# Altium PCB PCB1.PcbDoc
Units mm, origin at the board's own origin, x right, y up, seen from the top; angles counter-clockwise.
Board outline 57.66 x 24.64 mm, 2 copper layers (Top Layer, Bottom Layer); 30 components, 44 nets, 165 pads, 61 vias.
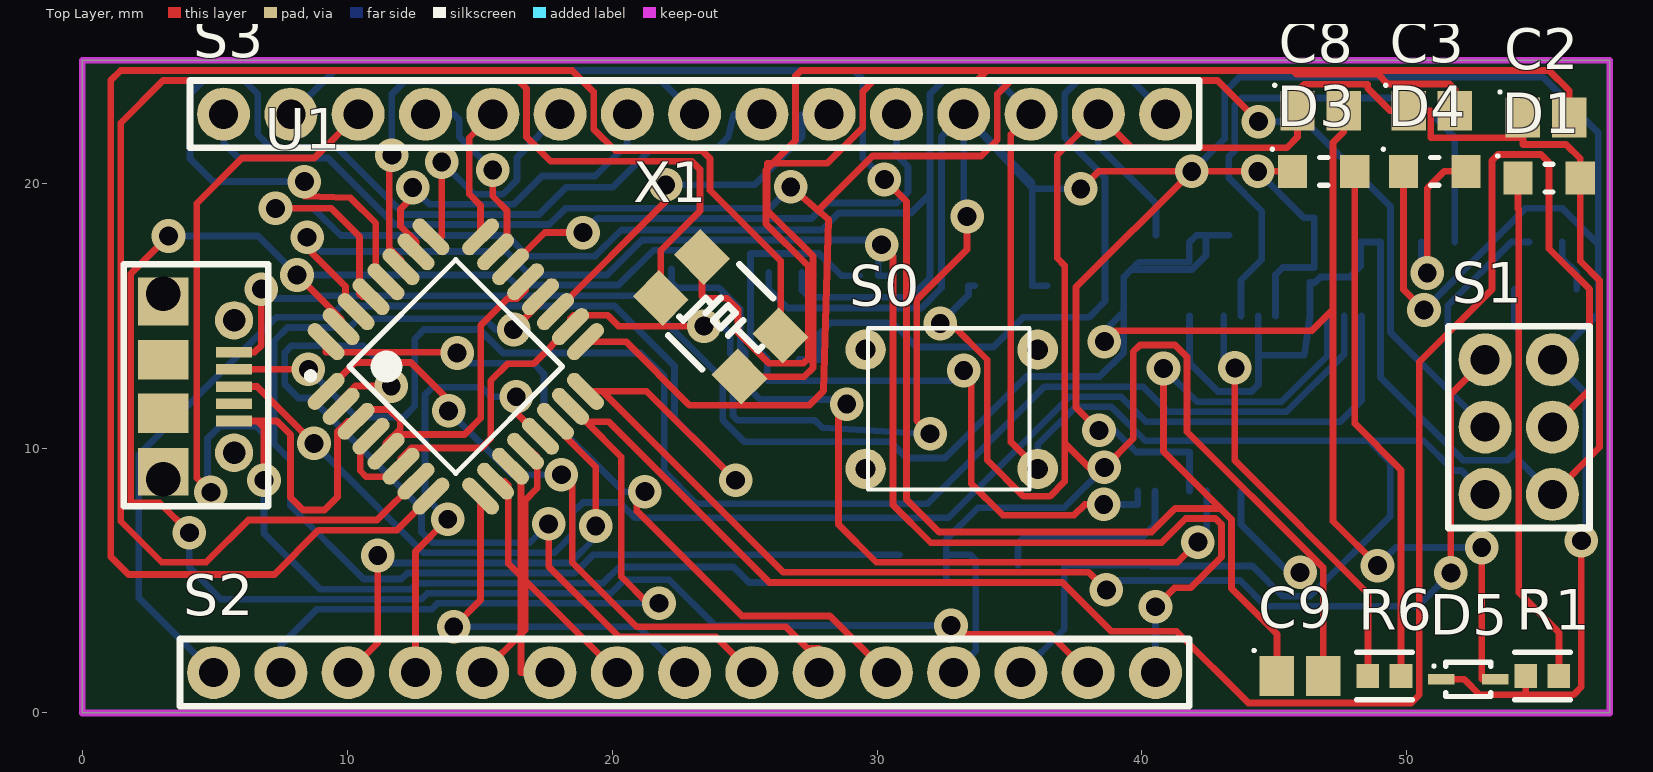
[diagram p0: Top Layer view]
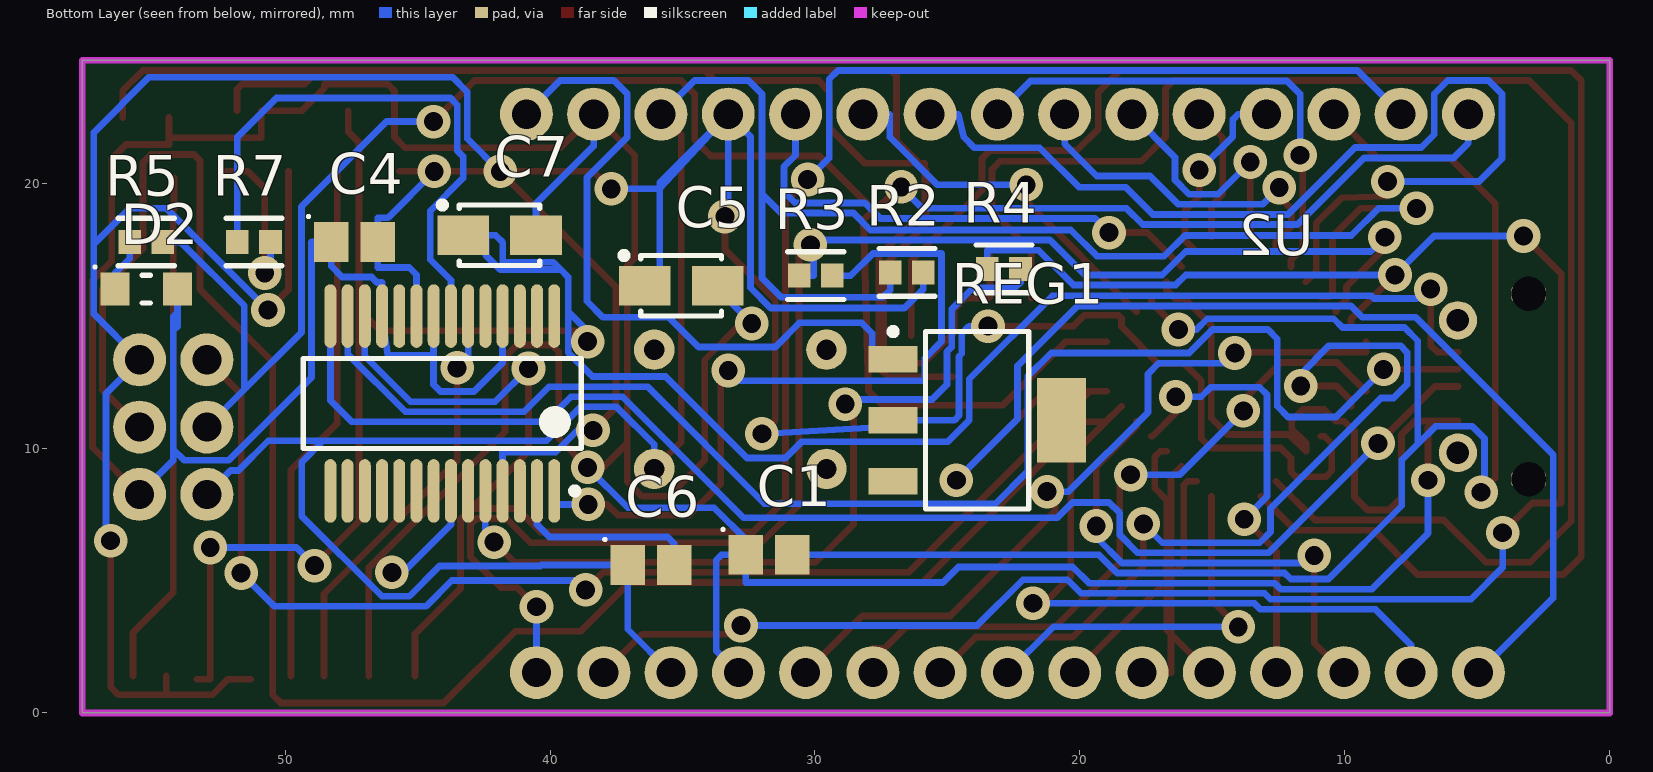
[diagram p1: Bottom Layer view, seen from below]

## Layer stack, top to bottom
Top Solder: solder mask 0.0102, Solder Resist, Dk 3.5
Top Layer: signal copper 0.0356
Dielectric 1: dielectric 0.32, FR-4, Dk 4.8
Bottom Layer: signal copper 0.0356
Bottom Solder: solder mask 0.0102, Solder Resist, Dk 3.5

## Board outline
0,0 0,24.638 57.658,24.638 57.658,0

## Design rules (kind name [scope] priority, off if disabled: settings)
Clearance [All] p1: gap=0.127 ignorepadtopadclearanceinfootprint=FALSE
PolygonConnect [All] p1: connectstyle=Relief reliefconductorwidth=0.254 reliefentries=4 polygonreliefangle="90 Angle" airgapwidth=0.254
RoutingVias [All] p1: holewidth=0.711 width=1.27 viastyle="Through Hole" minholewidth=0.711 minwidth=1.27 maxholewidth=0.711 maxwidth=1.27
SolderMaskExpansion [All] p1: expansion=0.102 istentingtop=FALSE
Width [All] p1: maxlimit=0.254 minlimit=0.254 preferedwidth=0.254
30 further rules are at their usual default settings.

## Components (designator, comment, footprint, x,y, rotation, side; value= is the part's Value field where it differs from the comment)
C1 "100nF Ceramic Multilayer Capacitor_1" CAPCP2012X09N 31.736,5.969 r180 bottom
C2 "C0805C180J5GACTU" CAPCP2012X09N 55.259,22.479 r0 top
C3 "C0805C180J5GACTU" CAPCP2012X09N 50.941,22.733 r0 top
C4 "100nF Ceramic Multilayer Capacitor_1" CAPCP2012X09N 47.385,17.78 r180 bottom
C5 "Capacitor SMT Tantalum" "CASE A - 3216X18" 35.052,16.129 r180 bottom value=4.7µF
C6 "100nF Ceramic Multilayer Capacitor_1" CAPCP2012X09N 36.195,5.588 r180 bottom
C7 "Capacitor SMT Tantalum" "CASE A - 3216X18" 41.91,18.034 r180 bottom value=4.7µF
C8 "100nF Ceramic Multilayer Capacitor_1" CAPCP2012X09N 46.75,22.733 r0 top
C9 "100nF Ceramic Multilayer Capacitor_1" CAPCP2012X09N 45.974,1.397 r0 top
D1 "Kingbright Blue LED, 60 mcd 120 ° 0805" LED1913X12NBLUE 55.372,20.193 r0 top
D2 "Kingbright Red LED, 100 mcd 120 ° 0805" LED1913X12NRED 55.245,16.002 r180 bottom
D3 "Kingbright Red LED, 100 mcd 120 ° 0805" LED1913X12NRED 46.863,20.447 r0 top
D4 "Kingbright Green LED, 70 mcd 120 ° 0805" LED1913X12NGREEN 51.054,20.447 r0 top
D5 "Panasonic DB2J20900L Schottky Diode, 0.5A, 20V, 2.4ns, 2-Pin SMini2 F5 B" DIOM1712X07N 52.324,1.27 r0 top
R1 "ERA-3AEB102V" FP-ERA3A-IPC_C 55.118,1.397 r0 top
R2 "ERA-3AEB102V" FP-ERA3A-IPC_C 26.534,16.637 r180 bottom
R3 "ERA-3AEB102V" FP-ERA3A-IPC_C 29.972,16.51 r180 bottom
R4 "ERA-3AEB102V" FP-ERA3A-IPC_C 22.869,16.764 r180 bottom
R5 "ERA-3AEB102V" FP-ERA3A-IPC_C 55.245,17.78 r180 bottom
R6 "ERA-3AEB102V" FP-ERA3A-IPC_C 49.158,1.397 r0 top
R7 "ERA-3AEB102V" FP-ERA3A-IPC_C 51.181,17.78 r180 bottom
REG1 "LM1117MP-5.0/NOPB, Low Dropout Voltage Regulator, 1.5A, 5 V ±1%, 4-Pin SOT-223" SOT230P700X180-4N 23.876,11.049 r180 bottom
S0 "Tactile Switch SPST- NO 0.05A @24V" "Tactile Switch" 36.068,9.216 r0 top
S1 "Programming Headers Dual Row" "ISP HEADER" 67.056,30.988 r270 top
S2 "connector;str header;single row;.1 cont centers;.095 tail;gold or gtx;36 contact" Header 40.513,1.524 r180 top
S3 "connector;str header;single row;.1 cont centers;.095 tail;gold or gtx;36 contact" Header 40.894,22.606 r180 top
S4 "NewMolex Right Angle SMT Female Type B Micro USB Connector, 30 V ac, 1.8A" MicroUSB 5.726,13.553 r270 top
U1 "ATMEGA328P-AU" TQFP80P900X900X120-32N 14.097,13.081 r45 top
U2 "FT232RL, Universal Asynchronous Receiver & Transmitter 3MBd, 28-Pin, SSOP" SOP65P780X200-28N 44.069,11.684 r90 bottom
X1 "Aker 16MHz Crystal SMT" "Aker S5C Crystal" 21.836,15.664 r135 top value=16MHz

## Footprints (in the part's own frame and the unit in brackets; to place one, negate y for a bottom-side part, rotate by r counter-clockwise, add the part's x,y. Pads: shape width x height; smd on the part's side, far side on the other; paste and mask are expansions set on the pad)
"Aker S5C Crystal" [mm]
  rect 1.6x1.4 smd: 1(0,0) 2(-4.2,0) 3(0,-2.2) 4(-4.2,-2.2)
  round 0.254 on Top Overlay: 5(-3,-2.4)
  silkscreen extent -4,-3 -1,0.8, body extent -4.7,-2.8 0.5,0.6, height 1
CAPCP2012X09N [mm] "Chip Capacitor, 2-Leads, Body 2.00x1.25mm, IPC Medium Density"
  rect 1.3x1.5 smd: 1(-0.875,0) 2(0.875,0)
  silkscreen extent -1.79,0.91 -1.69,1.01, body extent -1.05,-0.57 0.95,0.68, height 0.78
"CASE A - 3216X18" [mm] "Molded Capacitor, 2-Leads, Body 3.2x1.6mm, IPC Medium Density"
  rect 1.95x1.5 smd: 1(-1.375,0) 2(1.375,0)
  silkscreen extent -2.28,-1.14 1.52,1.27, body extent -1.52,-0.76 1.65,0.84, height 1.77
DIOM1712X07N [mm] "Molded Diode, 2-Leads, Body 1.70x1.25mm, IPC Medium Density"
  rect 1x0.4 smd: 1(-1.016,0) 2(1.016,0)
  silkscreen extent -1.35,-0.65 0.85,0.65, body extent -0.9,-0.45 0.9,0.45, height 0.8
FP-ERA3A-IPC_C [mm]
  rect 0.855x0.906 smd paste+0 mask+0: 1(-0.626,0) 2(0.626,0)
  silkscreen extent -1.05,-0.9 1.05,0.9, body extent -1.15,-0.6 1.15,0.6, height 0.25
Header [mm] "SIL Header"
  round 2 hole 1.1: 1(0,0) 2(2.54,0) 3(5.08,0) 4(7.62,0) 5(10.16,0) 6(12.7,0) 7(15.24,0) 8(17.78,0) 9(20.32,0) 10(22.86,0) 11(25.4,0) 12(27.94,0) 13(30.48,0) 14(33.02,0) 15(35.56,0)
  silkscreen extent -1.27,-1.27 36.83,1.27, body extent -1.33,-1.35 36.93,1.35, height 8.6
"ISP HEADER" [mm] "SIL Header for programming"
  round 2 hole 1.1: 1(17.653,-14.097) 2(17.653,-11.557) 3(20.193,-14.097) 4(20.193,-11.557) 5(22.733,-14.097) 6(22.733,-11.557)
  silkscreen extent 16.38,-15.49 24,-10.16, body extent 16.38,-15.37 24,-10.29, height 8
LED1913X12NBLUE [mm] "LED 2-Leads, Body 1.90x1.32mm, IPC Medium Density"
  rect 1.1x1.25 smd: 1(-1.175,0) 2(1.175,0)
  silkscreen extent -1.99,-0.53 0.15,0.89, body extent -1,-0.62 1.02,0.62, height 1.1
LED1913X12NGREEN [mm] "LED 2-Leads, Body 1.90x1.32mm, IPC Medium Density"
  rect 1.1x1.25 smd: 1(-1.175,0) 2(1.175,0)
  silkscreen extent -1.99,-0.53 0.15,0.89, body extent -1.01,-0.62 1.01,0.63, height 1.1
LED1913X12NRED [mm] "LED 2-Leads, Body 1.90x1.32mm, IPC Medium Density"
  rect 1.1x1.25 smd: 1(-1.175,0) 2(1.175,0)
  silkscreen extent -1.99,-0.53 0.15,0.89, body extent -1.02,-0.43 1.04,0.47, height 0.85
MicroUSB [mm] "MicroUSB  Molex 5Pin"
  rect 0.4x1.35 smd: 1(-0.07,0) 2(0.58,0) 3(1.23,0) 4(1.88,0) 5(2.53,0)
  rrect50% 0.6x1.3 hole 1.3: ""(-2.27,-2.667) ""(-2.27,-2.667) ""(4.73,-2.667)
  rect 1.8x1.9 smd: ""(-1.98,-2.678) ""(4.45,-2.678)
  round 1.45 hole 0.85: ""(-1.27,0) ""(3.73,0)
  rect 1.5x1.9 smd: ""(0.218,-2.678) ""(2.242,-2.678)
  silkscreen extent -3.39,-4.17 5.75,1.3, body extent -2.83,-5.32 5.37,0.11, height 2.68
SOP65P780X200-28N [mm] "SOP, 28-Leads, Body 10.20x5.30mm, Pitch 0.65mm, IPC Medium Density"
  oval 2.4x0.45 smd: 1(-3.3,-4.225) 2(-3.3,-3.575) 3(-3.3,-2.925) 4(-3.3,-2.275) 5(-3.3,-1.625) 6(-3.3,-0.975) 7(-3.3,-0.325) 8(-3.3,0.325) 9(-3.3,0.975) 10(-3.3,1.625) 11(-3.3,2.275) 12(-3.3,2.925) 13(-3.3,3.575) 14(-3.3,4.225) 15(3.3,4.225) 16(3.3,3.575) 17(3.3,2.925) 18(3.3,2.275) 19(3.3,1.625) 20(3.3,0.975) 21(3.3,0.325) 22(3.3,-0.325) 23(3.3,-0.975) 24(3.3,-1.625) 25(3.3,-2.275) 26(3.3,-2.925) 27(3.3,-3.575) 28(3.3,-4.225)
  silkscreen extent -3.42,-5.25 1.7,5.25, body extent -3.91,-5.1 3.91,5.1, height 0.5
SOT230P700X180-4N [mm] "SOT223, 4-Leads, Body 6.50x7.00mm (avg), Pitch 2.30mm, IPC Medium Density"
  rect 1.85x1 smd: 1(-3.175,2.3) 2(-3.175,0) 3(-3.175,-2.3)
  rect 1.85x3.2 smd: 4(3.175,0)
  silkscreen extent -3.3,-3.35 1.95,3.47, body extent -3.8,-3.12 3.29,3.38, height 1.65
"Tactile Switch" [mil]
  round 60 hole 30: 1(0,0) 2(-255.91,0) 3(0,177.17) 4(-255.91,177.17)
  silkscreen extent -252,-31 -12,209, body extent -277,-29 27,209, height 197
TQFP80P900X900X120-32N [mm] "TQFP, 32-Leads, Body 7.00x7.00mm, Pitch 0.80mm, IPC Medium Density"
  oval 1.75x0.55 smd: 1(-4.125,2.8) 2(-4.125,2) 3(-4.125,1.2) 4(-4.125,0.4) 5(-4.125,-0.4) 6(-4.125,-1.2) 7(-4.125,-2) 8(-4.125,-2.8) 17(4.125,-2.8) 18(4.125,-2) 19(4.125,-1.2) 20(4.125,-0.4) 21(4.125,0.4) 22(4.125,1.2) 23(4.125,2) 24(4.125,2.8)
  oval 0.55x1.75 smd: 9(-2.8,-4.125) 10(-2,-4.125) 11(-1.2,-4.125) 12(-0.4,-4.125) 13(0.4,-4.125) 14(1.2,-4.125) 15(2,-4.125) 16(2.8,-4.125) 25(2.8,4.125) 26(2,4.125) 27(1.2,4.125) 28(0.4,4.125) 29(-0.4,4.125) 30(-1.2,4.125) 31(-2,4.125) 32(-2.8,4.125)
  silkscreen extent -4.25,-2.85 2.85,3.75, body extent -4.44,-4.5 4.56,4.5, height 1.6

## Part data
C1 C4 C6 C8 C9: "AVX 0805 Standard 100nF Ceramic Multilayer Capacitor, 50 V dc X7R Dielectric ±10% SMD", Capacitance=100nF, Manufacturer=AVX, Package=0805, Voltage=50V, Creator="Ritesh Kanjee", Datasheet URL=http://za.rs-online.com/web/p/ceramic-multilayer-capacitors/4646688/, Date Created="18 February 2015", RS Stock No.=464-6688
C2 C3: library part "18pF Ceramic Multilayer Capacitor, 50 V dc C0G Dielectric ±5% SMD", "18pF Ceramic Multilayer Capacitor, 50 V dc C0G Dielectric ±5% SMD", Capacitance=18pF, Manufacturer=Kemet, Package=0805, Voltage=50V, Creator="Ritesh Kanjee", Datasheet URL=http://za.rs-online.com/web/p/ceramic-multilayer-capacitors/6480935/?searchTerm=C0805C180J5GACTU&relevancy-data=636F3D3226696E3D4931384E4B6E6F776E41734D504E266C753D656E266D6D3D6D61746368616C6C7061727469616C26706D3D5E5B5C707B4C7D5C707B4E647D2D2C2F255C2E5D2B2426706F3D313326736E3D592673743D4D414E5F504152545F4E554D4245522677633D424F5448267573743D4330383035433138304A35474143545526, Date Created="18 February 2015", RS Stock No.=648-0935
C5 C7: library part "4.7µF Tant RS 496-3545", "Capacitor,tantalum,SMT,16V,4.7uF,10%,A-case", Package=3216-18, Tolerance=10%, Voltage=16V, ComponentLink1Description="Supplier Website", ComponentLink1URL=http://za.rs-online.com/web/search/searchBrowseAction.html?method=getProduct&R=4963545, ComponentLink2Description="RS Data sheet", ComponentLink2URL=http://docs-europe.origin.electrocomponents.com/webdocs/04ed/0900766b804ed4cc.pdf, LatestRevisionDate=28-April-2010, Part Originator="H Theron", Publisher=DPSS, RS Stock Nr.=496-3545
D1: Color=Blue, Forward Voltage=3.2V, Manufacturer=KingBright, Manufacturer Part No.=KP-2012PBC-A, Creator="Ritesh Kanjee", Datasheet URL=http://za.rs-online.com/web/p/visible-leds/4663784/, Date Created="18 February 2015", RS Stock No.=466-3784
D2 D3: Color=RED, Forward Voltage=1.85V, Manufacturer=KingBright, Manufacturer Part No.=KP-2012SRC-PRV, Creator="Ritesh Kanjee", Datasheet URL=http://za.rs-online.com/web/p/visible-leds/4663813/, Date Created="18 February 2015", RS Stock No.=466-3813
D4: Color=Green, Forward Voltage="2.1 V", Manufacturer=KingBright, Manufacturer Part No.=KP-2012MGC, Creator="Ritesh Kanjee", Datasheet URL=http://za.rs-online.com/web/p/visible-leds/4663778/, Date Created="18 February 2015", RS Stock No.=466-3778
D5: library part "Schottky Diode, 0.5A, 20V, 2.4ns, 2-Pin SMini2 F5 B", Manufacturer=Panasonic, Manufacturer Part No.=DB2J20900L, Maximum Continuous Forward Current=0.5A, Peak Reverse Repetitive Voltage=20V, Created By="R Kanjee", Datasheet=http://docs-europe.electrocomponents.com/webdocs/1398/0900766b813986b3.pdf, Date Created="1 March 2015", RS Stock No.=713-2703
R1 R2: library part CMP-2000-00873-2, "RES SMD 1K OHM 0.1% 1/10W 0603", Case Code (Imperial)=0603, Case Code (Metric)=1608, Max Operating Temperature=155°C, Max Power Dissipation=100mW, Min Operating Temperature=-55°C, Package Quantity=5000, Resistance=1kR, Resistance Tolerance=0.1%, Resistor Type="Thin Film", Temperature Coefficient=25ppm/°C, Voltage Rating=75V, Case/Package=0603, Construction=Rectangular, Contact Plating=Tin, Depth=0.8mm, Height=0.45mm, Length=1.6mm, Military Standard=Not, Mount="Surface Mount", Number of Pins=2, Number of Terminations=2, Packaging="Tape and Reel", Power Rating=100mW, Radiation Hardening=No, REACH SVHC="No SVHC", RoHS Compliant=Yes, Series=ERA-3A, Size Code=0603, Technology="METAL FILM", Termination=SMD/SMT, Tolerance=0.1%, Width=0.8mm
R3 R4: library part CMP-2000-00873-2, "RES SMD 1K OHM 0.1% 1/10W 0603", Case Code (Imperial)=0603, Case Code (Metric)=1608, Max Operating Temperature=155°C, Max Power Dissipation=100mW, Min Operating Temperature=-55°C, Package Quantity=5000, Resistance=1k, Resistance Tolerance=0.1%, Resistor Type="Thin Film", Temperature Coefficient=25ppm/°C, Voltage Rating=75V, Case/Package=0603, Construction=Rectangular, Contact Plating=Tin, Depth=0.8mm, Height=0.45mm, Length=1.6mm, Military Standard=Not, Mount="Surface Mount", Number of Pins=2, Number of Terminations=2, Packaging="Tape and Reel", Power Rating=100mW, Radiation Hardening=No, REACH SVHC="No SVHC", RoHS Compliant=Yes, Series=ERA-3A, Size Code=0603, Technology="METAL FILM", Termination=SMD/SMT, Tolerance=0.1%, Width=0.8mm
R5 R6 R7: library part CMP-2000-00873-2, "RES SMD 1K OHM 0.1% 1/10W 0603", Case Code (Imperial)=0603, Case Code (Metric)=1608, Max Operating Temperature=155°C, Max Power Dissipation=100mW, Min Operating Temperature=-55°C, Package Quantity=5000, Resistance=330, Resistance Tolerance=0.1%, Resistor Type="Thin Film", Temperature Coefficient=25ppm/°C, Voltage Rating=75V, Case/Package=0603, Construction=Rectangular, Contact Plating=Tin, Depth=0.8mm, Height=0.45mm, Length=1.6mm, Military Standard=Not, Mount="Surface Mount", Number of Pins=2, Number of Terminations=2, Packaging="Tape and Reel", Power Rating=100mW, Radiation Hardening=No, REACH SVHC="No SVHC", RoHS Compliant=Yes, Series=ERA-3A, Size Code=0603, Technology="METAL FILM", Termination=SMD/SMT, Tolerance=0.1%, Width=0.8mm
REG1: library part LM1117MP-5.0, Manufacturer="Texas Instruments", Maximum Input Voltage=15V, Output Voltage=5V, Supply Current=1.5Amps, Created By="R Kanjee", Datasheet URL=http://za.rs-online.com/web/p/low-dropout-voltage-regulators/5339583/, Date Created="26 February 2015", RS Stock No.=533-9583
S0: Manufacturer=Omron, Manufacturer Part No.=B3F1000, Creator="R Kanjee", Date Created="25 February 2015", RS Stock No.=686-6847, State="Normaly Open"
S1: library part "Programming ISP, Programming Headers Dual Row", Current Rating="3Amps Continuous", Manufacturer=FCI, Manufacturer Part No.=68000-236HLF, Created By="R Kanjee", Date Created="1 March 2015", RS Stock No.=2509565626
S2 S3: library part "Single row; PCB headers", Current Rating="3Amps Continuous", Manufacturer=FCI, Manufacturer Part No.=68000-236HLF, Created By="R Kanjee", Date Created="1 March 2015", RS Stock No.=2509565626
S4: library part "Micro USB Connector, 30 V ac, 1.8A", Manufacturer=Molex, Manufacturer Part No.=105017-0001, Max Current=1.8A, Max Voltage=30V, Creator="R Kanjee", Datasheet URL=http://za.rs-online.com/web/p/micro-usb-connectors/8486764/, Date Created="28 February 2015", RS Stock No=848-6764
U1: "ATMEGA328P-AU, 8 bit AVR Microcontroller 20MHz 1 kB, 32 kB Flash, 2 kB RAM, I2C 32-Pin TQFP", Company="Lumina Inova", Created By="Ritesh Kanjee", Datasheet URL=http://docs-europe.electrocomponents.com/webdocs/0db4/0900766b80db4deb.pdf, Date Created="14 February 2015", RS Stock No.=696-3092
U2: library part "FT232RL USB to UART, Universal Asynchronous Receiver & Transmitter 3MBd, 28-Pin, SSOP", Manufacturer="FTDI Chip", Manufacturer Part No.=FT232RL, Creator="R Kanjee", Date Created="03 March 2015", Pin Count=28, RS Stock No.=406-580
X1: library part "Aker  C5S-16.000-12-3030-X", "Aker S5C SMT Crystal", Frequency Stability=+/-30ppm, Load Capacitance=12pF, Manufacturer=Aker, Manufacturer Part #=C5S-16.000-12-3030-X, Package="3.2x5mm SMD", Creator="R Kanjee", HelpURL=http://za.rs-online.com/web/p/crystal-units/6719488/, RS="RS 671-9488", RS Stock Nr.=671-9488, Supplier=RS

## Via types
v1: diameter 1.27, hole 0.711, Top Layer to Bottom Layer, 61 vias

## Nets (pads, with @x,y where several pads share a name; then routed paths per layer and width w, separated by ;. In a path a pad name is that pad's centre, name@x,y a point inside that pad or via, vN(x,y) a via of type N, cw(c..) or ccw(c..) an arc to the next point about the centre after c; other vN are vias at no path point)
3v3: C9.1 S3.14 U2.17 | length 74
  Top Layer w0.254: v1(30.277,20.142) 31.115,19.304 31.115,8.057 32.339,6.833 40.368,6.833 41.257,7.722 42.971,7.722 ; v1(40.818,13.005) 40.818,9.875 42.971,7.722 ; C9.1 45.099,2.983 43.383,4.699 43.383,7.309 42.971,7.722
  Bottom Layer w0.254: S3.14 9.525,24.257 29.134,24.257 29.464,23.927 29.464,20.955 v1(30.277,20.142) ; v1(40.818,13.005) 42.071,11.752 45.28,11.752 46.994,13.466 U2.17
+5: C4.2 C5.1 D3.1 D4.1 D5.1 R1.1 R2.2 REG1.2 S1.2 S3.4 U1.4 U1.6 U1.18 U2.4 U2.20 | length 167.4
  Top Layer w0.254: U1.4 10.764,10.447 10.49,10.173 10.49,9.144 10.719,8.915 11.836,8.915 12.029,9.108 U1.6 12.029,9.616 12.421,10.008 15.062,10.008 15.418,10.363 15.418,12.548 16.053,13.183 17.027,13.183 U1.18 18.428,14.897 18.542,15.011 19.837,15.011 20.244,14.605 v1(23.47,14.605) ; v1(32.004,10.541) 31.496,11.049 31.496,15.596 33.401,17.501 v1(33.401,18.745) ; v1(37.694,19.787) 38.354,20.447 v1(41.885,20.447) ; v1(38.379,10.668) 37.516,11.532 37.516,16.078 v1(41.885,20.447) ; D3.1 v1(44.374,20.447) v1(41.885,20.447) ; D4.1 49.879,15.983 v1(50.648,15.215) ; D5.1 52.172,1.27 52.756,0.686 54.492,0.686 ; R1.1 54.492,0.686 ; v1(56.591,6.502) 56.591,0.991 56.286,0.686 54.492,0.686
  Bottom Layer w0.254: v1(23.47,14.605) 24.181,14.605 24.46,14.326 24.46,13.564 24.562,13.462 24.562,11.227 24.74,11.049 REG1.2 27.661,11.049 27.94,10.77 31.852,10.541 v1(32.004,10.541) ; R2.2 25.908,16.002 26.619,15.291 31.674,15.291 32.436,16.053 32.436,21.768 S3.4 ; v1(33.401,18.745) 33.274,18.872 S3.4 ; C5.1 35.865,16.129 35.865,19.787 ; v1(37.694,19.787) 35.865,19.787 ; v1(38.379,10.668) 38.974,10.668 39.787,9.855 41.794,9.855 U2.4 ; v1(41.885,20.447) 43.129,21.692 43.129,23.444 43.688,24.003 55.143,24.003 57.226,21.92 57.226,17.704 ; v1(44.374,20.447) 46.126,18.694 46.51,18.694 C4.2 46.51,16.819 45.318,16.819 45.044,16.545 U2.20 ; v1(50.648,15.215) 54.483,19.05 55.88,19.05 57.226,17.704 ; v1(56.591,6.502) 56.769,6.68 56.769,12.065 S1.2 57.226,15.062 57.226,17.704 ; S3.4 35.865,19.787 ; S3.4 35.865,20.015 35.865,19.787
A0: S3.12 U1.23 | length 7.3
  Top Layer w0.254: v1(15.494,20.498) 15.494,19.507 16.027,18.974 16.027,17.84 U1.23
  Bottom Layer w0.254: S3.12 14.021,22.606 14.224,22.403 14.224,21.768 v1(15.494,20.498)
A1: S3.11 U1.24 | length 5.2
  Top Layer w0.254: U1.24 15.034,19.165 14.605,19.594 14.605,21.717 S3.11
A2: S3.10 U1.25 | length 10
  Top Layer w0.254: U1.25 13.566,17.978 v1(13.566,20.803)
  Bottom Layer w0.254: v1(13.566,20.803) 14.786,19.583 15.872,19.583 16.406,20.117 16.406,20.978 S3.10
A3: S3.9 U1.26 | length 13.3
  Top Layer w0.254: v1(12.471,19.837) 12.471,19.482 12.014,19.025 12.014,18.375 12.594,17.795 U1.26
  Bottom Layer w0.254: v1(12.471,19.837) 13.106,19.202 16.282,19.202 17.355,20.276 19.361,20.276 20.574,21.488 S3.9
A4: S3.8 U1.27 | length 18.9
  Top Layer w0.254: v1(11.684,21.057) 11.582,20.955 11.582,17.551 12.029,17.105 U1.27
  Bottom Layer w0.254: v1(11.684,21.057) 11.684,23.368 12.176,23.86 21.86,23.86 S3.8
A5: S3.7 U1.28 | length 39.8
  Top Layer w0.254: v1(8.382,20.062) 8.382,19.507 10.109,19.456 11.074,18.491 11.074,16.669 U1.28
  Bottom Layer w0.254: v1(8.382,20.062) 4.932,20.062 4.064,20.93 4.064,23.368 4.572,23.876 6.112,23.876 6.62,23.368 6.62,21.844 7.112,21.352 9.611,21.352 12.141,18.821 17.245,18.821 18.276,19.853 20.03,19.853 21.514,21.336 23.978,21.336 24.384,21.742 24.587,22.606 S3.7
A6: S3.6 U1.19 | length 14.3
  Top Layer w0.254: U1.19 22.022,19.309 v1(22.022,19.939)
  Bottom Layer w0.254: v1(22.022,19.939) 25.375,19.939 27.178,21.742 27.178,22.606 S3.6
A7: S3.5 U1.22 | length 19.3
  Top Layer w0.254: U1.22 17.455,18.136 v1(18.898,18.136)
  Bottom Layer w0.254: v1(18.898,18.136) 19.431,18.669 27.534,18.669 28.118,19.253 30.745,19.253 31.166,19.674 31.166,20.625 30.734,21.057 S3.5
AREF: C1.2 S3.13 U1.20 | length 65.9
  Top Layer w0.254: v1(4.851,8.331) 4.318,8.865 4.318,19.239 6.03,20.951 8.759,20.951 S3.13 ; v1(16.281,14.478) 17.297,15.493 U1.20
  Bottom Layer w0.254: v1(4.851,8.331) 4.724,8.458 4.724,10.363 5.182,10.82 6.579,10.82 7.245,10.154 ; v1(16.281,14.478) 15.596,14.478 15.189,14.884 10.414,14.884 10.084,14.554 7.747,14.554 7.245,14.053 7.245,10.154 ; C1.2 19.279,5.969 18.593,5.283 12.268,5.283 12.04,5.055 10.617,5.055 7.849,7.823 7.849,9.55 7.245,10.154
D0/Rx: R3.1 S2.1 U1.30 | length 58.9
  Top Layer w0.254: v1(8.484,17.958) 8.28,17.755 9.931,16.104 9.931,15.615 10.332,15.215 U1.30 ; v1(30.175,17.678) 30.607,17.247 30.607,7.849 32.029,6.426 40.742,6.426 41.656,7.341 42.774,7.341 43.002,7.112 43.002,5.893 41.834,4.724 41.224,4.724 v1(40.513,4.013)
  Bottom Layer w0.254: v1(8.484,17.958) 9.017,17.424 16.002,17.424 16.891,16.535 19.812,16.535 21.133,17.856 29.743,17.856 29.921,17.678 v1(30.175,17.678) 30.048,17.551 30.048,16.51 R3.1 ; S2.1 v1(40.513,4.013)
D1/Tx: R4.1 S2.2 U1.31 | length 75.8
  Top Layer w0.254: v1(3.251,18.009) 1.829,16.586 1.829,7.925 2.921,7.925 v1(4.039,6.807) ; v1(8.103,16.535) 9.766,14.872 U1.31 ; v1(32.791,3.302) 33.122,2.972 36.525,2.972 S2.2
  Bottom Layer w0.254: v1(3.251,18.009) 6.629,18.009 v1(8.103,16.535) 16.002,16.535 16.383,16.154 20.245,16.154 21.562,17.471 23.495,17.471 R4.1 ; v1(4.039,6.807) 4.039,5.486 5.232,4.293 12.802,4.293 13.03,4.521 19.964,4.521 20.472,5.029 22.149,5.029 23.876,3.302 v1(32.791,3.302)
D2: S2.5 U1.32 | length 28.5
  Top Layer w0.254: U1.32 9.2,13.614 14.122,13.614 v1(14.148,13.589) ; v1(21.234,8.357) 21.162,8.357 20.934,8.128 20.934,7.622 24.898,3.658 28.219,3.658 S2.5
  Bottom Layer w0.254: v1(14.148,13.589) 14.122,13.589 14.122,13.411 14.326,13.208 17.022,13.208 17.428,12.802 17.428,11.35 20.422,8.357 v1(21.234,8.357)
D3: S2.6 U1.1 | length 26.4
  Top Layer w0.254: U1.1 10.29,13.233 12.404,13.233 13.826,11.811 v1(13.826,11.405) ; v1(18.085,8.992) 18.491,8.585 18.491,5.69 20.93,3.251 26.568,3.251 27.381,2.438 27.813,2.438 S2.6
  Bottom Layer w0.254: v1(13.826,11.405) 16.239,8.992 v1(18.085,8.992)
D4: S2.7 U1.2 | length 32.8
  Top Layer w0.254: U1.2 9.766,11.798 10.312,12.344 v1(11.659,12.344) ; v1(17.602,7.137) 17.602,5.537 20.269,2.87 23.927,2.87 S2.7
  Bottom Layer w0.254: v1(11.659,12.344) 11.659,12.802 10.592,13.868 7.899,13.868 7.645,13.614 7.645,12.395 8.153,11.887 8.636,11.887 12.802,7.722 12.802,6.833 13.208,6.426 16.891,6.426 v1(17.602,7.137)
D5: S2.8 U1.9 | length 14.8
  Top Layer w0.254: v1(14.021,3.251) 15.034,4.264 U1.9
  Bottom Layer w0.254: v1(14.021,3.251) 21.006,3.251 S2.8
D6: S2.9 U1.10 | length 9.3
  Top Layer w0.254: U1.10 15.939,8.75 16.078,8.611 16.078,5.639 S2.9
D7: S2.10 U1.11 | length 9
  Top Layer w0.254: U1.11 16.561,8.92 16.561,1.524 S2.10
D8: S2.11 U1.12 | length 9.5
  Top Layer w0.254: S2.11 16.713,3.124 16.713,8.026 17.17,8.484 17.17,9.677 16.966,9.881 U1.12
D9: S2.12 U1.13 | length 17
  Top Layer w0.254: S2.12 12.573,6.096 v1(13.792,7.315) ; v1(16.383,11.938) 16.383,11.328 17.264,10.447 U1.13
  Bottom Layer w0.254: v1(13.792,7.315) 12.937,8.17 12.937,12.023 13.208,12.294 15.062,12.294 15.418,11.938 v1(16.383,11.938)
D10: S2.13 U1.14 | length 18.6
  Top Layer w0.254: S2.13 11.151,2.642 v1(11.151,5.944) ; U1.14 17.862,10.811 19.38,9.293 v1(19.38,7.061)
  Bottom Layer w0.254: v1(11.151,5.944) 11.43,5.664 18.411,5.664 19.38,6.634 v1(19.38,7.061)
D11/MOST: S1.4 S2.14 U1.15 | length 95.9
  Top Layer w0.254: U1.15 U1.15@19.007,10.999 ; v1(21.768,4.14) 21.361,4.14 20.345,5.156 20.345,9.661 U1.15@19.007,10.999 ; S1.4 56.896,12.192 56.896,16.002 55.372,17.526 55.372,20.777 55.067,21.082 53.442,21.082 53.213,20.853 53.213,15.991 50.47,13.248 50.47,0.686 50.165,0.381 44.018,0.381 41.317,3.082 38.847,3.082 37.001,4.928 25.933,4.928 19.862,10.999 U1.15@19.007,10.999
  Bottom Layer w0.254: S2.14 7.493,2.565 8.839,3.912 13.183,3.912 13.411,4.14 v1(21.768,4.14)
D12/MISO: S1.1 S2.15 U1.16 | length 90
  Top Layer w0.254: U1.16 19.631,12.144 ; v1(24.663,8.788) 21.308,12.144 19.631,12.144 ; v1(38.659,4.648) 37.998,5.309 26.467,5.309 19.631,12.144 ; v1(51.664,5.283) 51.664,12.04 S1.1
  Bottom Layer w0.254: S2.15 2.134,4.343 2.134,9.754 7.315,14.935 9.334,14.935 9.765,15.367 20.091,15.367 22.352,13.106 22.352,11.1 v1(24.663,8.788) ; v1(38.659,4.648) 39.014,5.004 43.713,5.004 44.69,4.027 50.408,4.027 v1(51.664,5.283)
D13/SCK: R5.2 S1.3 S3.15 U1.17 | length 87.1
  Top Layer w0.254: U1.17 20.523,14.018 22.925,11.616 27.432,11.616 27.978,12.162 28.171,18.631 ; v1(26.746,19.863) 27.773,18.975 ; v1(44.399,22.327) 42.85,23.876 35.052,23.876 34.544,23.368 34.544,21.641 33.934,21.031 29.829,21.031 27.773,18.975 ; 27.773,18.975 28.171,18.631 ; 27.773,18.975 28.171,18.631
  Bottom Layer w0.254: S3.15 5.334,21.514 5.893,20.955 9.271,20.955 11.786,18.44 17.628,18.44 18.237,19.05 25.933,19.05 v1(26.746,19.863) ; v1(44.399,22.327) 46.177,22.327 49.389,19.115 49.389,14.365 51.548,12.206 ; S1.3 51.548,12.206 ; R5.2 53.95,17.78 51.548,15.378 51.548,12.206
GND: C1.1 C2.1 C3.1 C4.1 C5.2 C7.2 C8.1 C9.2 D1.2 D2.2 S1.6 S2.4 S3.2 S4.5 U1.3 U1.5 U1.21 U2.7 U2.18 U2.21 U2.25 | length 205.5
  Top Layer w0.254: S4.5 6.605,11.023 ; v1(6.858,8.788) 6.858,10.77 6.605,11.023 ; U1.21 16.731,15.969 16.408,15.646 16.053,15.646 15.037,14.63 15.037,11.125 14.427,10.516 12.097,10.516 U1.5 11.463,10.193 12,10.73 12,11.038 11.582,11.455 10.774,11.455 U1.3 10.022,11.013 9.633,10.624 9.633,8.153 9.144,7.664 8.331,7.664 7.855,8.14 7.855,10.508 7.341,11.023 6.605,11.023 ; v1(32.385,14.707) 32.791,14.707 34.163,13.335 34.163,9.55 35.535,8.179 36.525,8.179 37.084,8.738 37.084,10.185 ; v1(45.974,5.309) 46.495,5.829 ; C9.2 46.849,5.475 46.495,5.829 ; C2.1 54.384,21.717 ; S1.6 57.277,10.033 57.277,16.332 56.547,17.062 D1.2 56.547,20.93 56.014,21.463 54.384,21.463 54.384,21.717 ; 37.084,10.185 37.084,16.891 36.805,17.17 36.805,21.057 S3.2 39.624,21.336 45.469,21.336 45.875,21.742 C8.1 45.875,23.486 46.126,23.737 48.529,23.737 48.529,23.582 49.378,22.733 C3.1 50.902,22.733 50.902,21.717 54.384,21.717 ; 37.084,10.185 37.998,9.271 v1(38.583,9.271) 39.675,10.363 39.675,13.64 39.929,13.894 41.25,13.894 41.707,13.437 41.707,10.617 46.495,5.829
  Bottom Layer w0.254: v1(6.858,8.788) 6.858,6.782 8.966,4.674 12.421,4.674 12.649,4.902 19.66,4.902 20.269,5.512 24.587,5.512 25.171,4.928 32.611,4.928 C1.1 ; v1(32.385,14.707) 33.452,15.773 33.452,16.129 C5.2 ; S2.4 33.731,2.362 33.731,5.766 33.528,5.969 C1.1 ; S3.2 38.354,21.409 40.535,19.228 C7.2 ; v1(38.583,9.271) 37.059,7.747 33.805,7.747 32.611,6.553 C1.1 ; U2.25 41.794,13.214 42.875,12.133 44.137,12.133 44.399,12.395 44.399,13.508 ; U2.7 43.744,7.112 45.547,5.309 v1(45.974,5.309) ; D2.2 54.07,15.113 ; S1.6 54.229,9.525 54.229,9.957 ; 44.399,13.508 U2.21 44.394,13.513 44.399,13.508 ; 44.399,13.508 46.126,13.513 U2.18 46.344,16.256 46.533,16.256 46.736,16.459 47.854,16.459 48.26,16.866 C4.1 49.008,17.78 49.008,12.664 52.135,9.536 53.809,9.536 54.229,9.957 ; 54.07,15.113 54.07,14.589 54.229,14.43 ; 54.07,15.113 54.229,14.954 54.229,14.43 ; 54.229,9.957 54.229,14.43
NetC2_2: C2.2 X1.3 | length 49.6
  Top Layer w0.254: X1.3 23.391,15.725 23.458,15.658 24.333,15.658 24.751,15.24 24.751,14.365 25.908,13.208 27.229,13.208 27.407,13.386 27.407,16.866 25.806,18.466 25.806,20.498 26.924,21.615 26.924,24.054 27.127,24.257 55.372,24.257 56.134,23.495 C2.2
NetC3_2: C3.2 X1.2 | length 40.7
  Top Layer w0.254: X1.2 27.249,12.694 27.584,13.03 27.584,17.247 25.857,18.974 25.857,20.752 28.118,20.752 29.464,22.098 29.464,23.47 29.87,23.876 33.782,23.876 34.163,24.257 45.695,24.257 45.834,24.118 48.91,24.118 49.279,23.749 51.613,23.749 51.816,23.546 C3.2
NetC6_2: C6.2 U2.2 | length 7.6
  Bottom Layer w0.254: C6.2 35.32,6.403 35.56,6.643 40.025,6.643 40.494,7.112 U2.2
NetD1_1: D1.1 R1.2 | length 19.4
  Top Layer w0.254: D1.1 54.197,19.039 54.229,19.007 54.229,4.547 55.744,3.032 R1.2
NetD2_1: D2.1 R5.1 | length 2
  Bottom Layer w0.254: R5.1 55.871,17.161 56.42,16.612 D2.1
NetD3_2: D3.2 R6.2 | length 19.8
  Top Layer w0.254: D3.2 48.038,10.922 49.784,9.176 R6.2
NetD4_2: D4.2 R7.2 | length 6.2
  Top Layer w0.254: v1(50.775,16.612) 50.775,19.812 51.41,20.447 D4.2
  Bottom Layer w0.254: R7.2 50.555,16.831 v1(50.775,16.612)
NetR6_1: R6.1 U2.23 | length 15.8
  Top Layer w0.254: v1(43.51,13.03) 43.51,9.525 48.533,4.503 R6.1
  Bottom Layer w0.254: U2.23 43.094,13.446 v1(43.51,13.03)
NetR7_1: R7.1 U2.22 | length 21.9
  Bottom Layer w0.254: U2.22 43.744,16.337 44.526,17.12 44.526,18.948 43.282,20.193 43.282,21.006 43.51,21.234 43.51,22.962 43.764,23.216 50.333,23.216 51.807,21.742 R7.1
NetS4_2: S4.2 U2.16 | length 54.9
  Top Layer w0.254: S4.2 v1(8.534,12.973)
  Bottom Layer w0.254: v1(8.534,12.973) 10.331,11.176 12.141,11.176 12.548,11.582 12.548,14.122 12.903,14.478 14.986,14.478 15.875,13.589 21.082,13.589 21.971,12.7 21.971,9.119 23.19,7.899 31.902,7.899 36.322,12.319 40.03,12.319 40.978,11.371 45.464,11.371 47.644,13.551 U2.16
NetS4_3: S4.3 U2.15 | length 52.5
  Top Layer w0.254: S4.3 6.6,12.323 v1(8.744,10.179)
  Bottom Layer w0.254: v1(8.744,10.179) 12.878,6.045 17.814,6.045 18.491,6.722 18.491,7.544 18.898,7.95 20.281,7.95 20.865,7.366 32.69,7.366 37.262,11.938 39.217,11.938 40.165,10.99 47.486,10.99 48.294,11.798 U2.15
RESET: C6.1 R2.1 S0.1 S1.5 S2.3 S3.3 U1.29 | length 106
  Top Layer w0.254: v1(7.29,19.05) 9.398,19.05 10.465,17.983 10.465,15.824 10.574,15.715 U1.29 ; S3.3 35.052,21.844 35.052,10.232 S0.1
  Bottom Layer w0.254: v1(7.29,19.05) 8.733,19.05 9.754,18.03 16.032,18.03 16.815,17.247 19.355,17.247 20.345,18.237 27.915,18.237 28.55,18.872 31.279,18.872 32.004,19.597 ; R2.1 27.159,15.97 27.432,15.697 31.279,15.697 32.004,16.422 32.004,19.597 ; S2.3 37.07,3.161 C6.1 40.33,5.588 40.368,5.55 44.172,5.55 45.314,4.408 46.353,4.408 49.378,7.433 49.378,9.463 48.565,10.276 ; S3.3 34.544,23.876 32.512,23.876 32.004,23.368 32.004,19.597 ; S0.1 36.068,10.135 37.49,11.557 38.847,11.557 40.128,10.276 48.565,10.276 ; S1.5 52.059,9.155 51.762,9.155 50.641,10.276 48.565,10.276
Rx: R3.2 U2.1 | length 29
  Top Layer w0.254: v1(33.274,12.929) 33.553,12.649 33.553,8.661 34.747,7.468 37.44,7.468 37.846,7.874 v1(38.557,7.874)
  Bottom Layer w0.254: R3.2 28.651,16.51 27.813,17.348 25.222,17.348 25.222,14.021 25.857,13.386 25.857,12.548 33.02,12.548 33.274,12.802 v1(33.274,12.929) ; v1(38.557,7.874) 39.844,7.874 U2.1
Tx: R4.2 U2.5 | length 31.8
  Top Layer w0.254: v1(28.854,11.659) 28.55,11.354 28.55,7.112 29.972,5.69 41.351,5.69 v1(42.113,6.452)
  Bottom Layer w0.254: R4.2 22.244,16.256 22.447,16.053 24.028,16.053 24.841,15.24 24.841,13.818 25.019,13.64 25.019,12.395 25.578,11.836 28.677,11.836 v1(28.854,11.659) ; v1(42.113,6.452) 42.444,6.782 U2.5
Vin: REG1.1 S3.1 | length 26.8
  Bottom Layer w0.254: REG1.1 27.838,13.349 27.838,14.326 28.245,14.732 30.582,14.732 31.496,13.818 34.392,13.818 35.509,14.935 37.998,14.935 38.608,15.545 38.608,20.218 37.084,21.742 37.084,23.368 37.592,23.876 39.624,23.876 S3.1
VUSB: C7.1 C8.2 D5.2 S4.1 | length 91.1
  Top Layer w0.254: S4.1 6.502,13.623 6.756,13.877 v1(6.756,16.002) ; v1(38.583,14.021) 38.989,14.427 46.406,14.427 47.219,15.24 ; C8.2 47.625,21.946 47.219,21.539 47.219,15.24 ; v1(48.895,5.563) 47.219,7.239 47.219,15.24 ; v1(52.832,6.248) 52.832,1.27 D5.2
  Bottom Layer w0.254: v1(6.756,16.002) 6.934,16.002 7.29,15.646 8.89,15.646 8.992,15.748 21.031,15.748 24.181,12.598 24.181,11.049 24.994,10.236 30.508,10.236 31.115,9.629 32.565,9.629 35.636,12.7 38.405,12.7 39.319,13.614 39.319,15.164 ; v1(38.583,14.021) 38.583,14.427 39.319,15.164 ; C7.1 C7.1@42.418,18.034 ; v1(48.895,5.563) 49.581,6.248 v1(52.832,6.248) ; 39.319,15.164 39.319,16.459 39.599,16.739 ; 39.599,16.739 39.878,17.018 41.783,17.018 41.783,17.755 42.062,18.034 C7.1@42.418,18.034 ; 39.599,16.739 41.885,16.739 42.418,17.272 C7.1@42.418,18.034
XTAL1: U1.7 X1.1 | length 58.6
  Top Layer w0.254: U1.7 11.127,7.283 6.267,7.283 4.674,5.69 2.997,5.69 1.448,7.239 1.448,22.276 3.048,23.876 16.459,23.876 16.764,23.571 16.764,21.742 17.678,20.828 23.012,20.828 23.317,20.523 23.317,18.948 21.836,17.467 X1.1
XTAL2: U1.8 X1.4 | length 64.3
  Top Layer w0.254: U1.8 11.878,6.902 8.92,6.902 7.251,5.232 1.745,5.232 1.067,5.911 1.067,23.876 1.448,24.257 18.491,24.257 19.304,23.444 19.304,22.047 20.117,21.234 23.393,21.234 23.698,20.93 23.698,19.736 26.361,17.073 X1.4
pads on no net: REG1.3 REG1.4 S0.2 S0.3 S0.4 S4. S4.4 U2.3 U2.6 U2.8 U2.9 U2.10 U2.11 U2.12 U2.13 U2.14 U2.19 U2.24 U2.26 U2.27 U2.28 X1.5

## Keep-outs
Keep-Out Layer:
  the board outline again, w0.254